# Altium PCB PCB_BoargV1_2.PcbDoc
Units mm, origin at the board's own origin, x right, y up, seen from the top; angles counter-clockwise.
Board outline 68.25 x 53.25 mm, 2 copper layers (Top Layer, Bottom Layer); 56 components, 60 nets, 239 pads, 32 vias.
Unrouted connection lines stored in the file: 43.
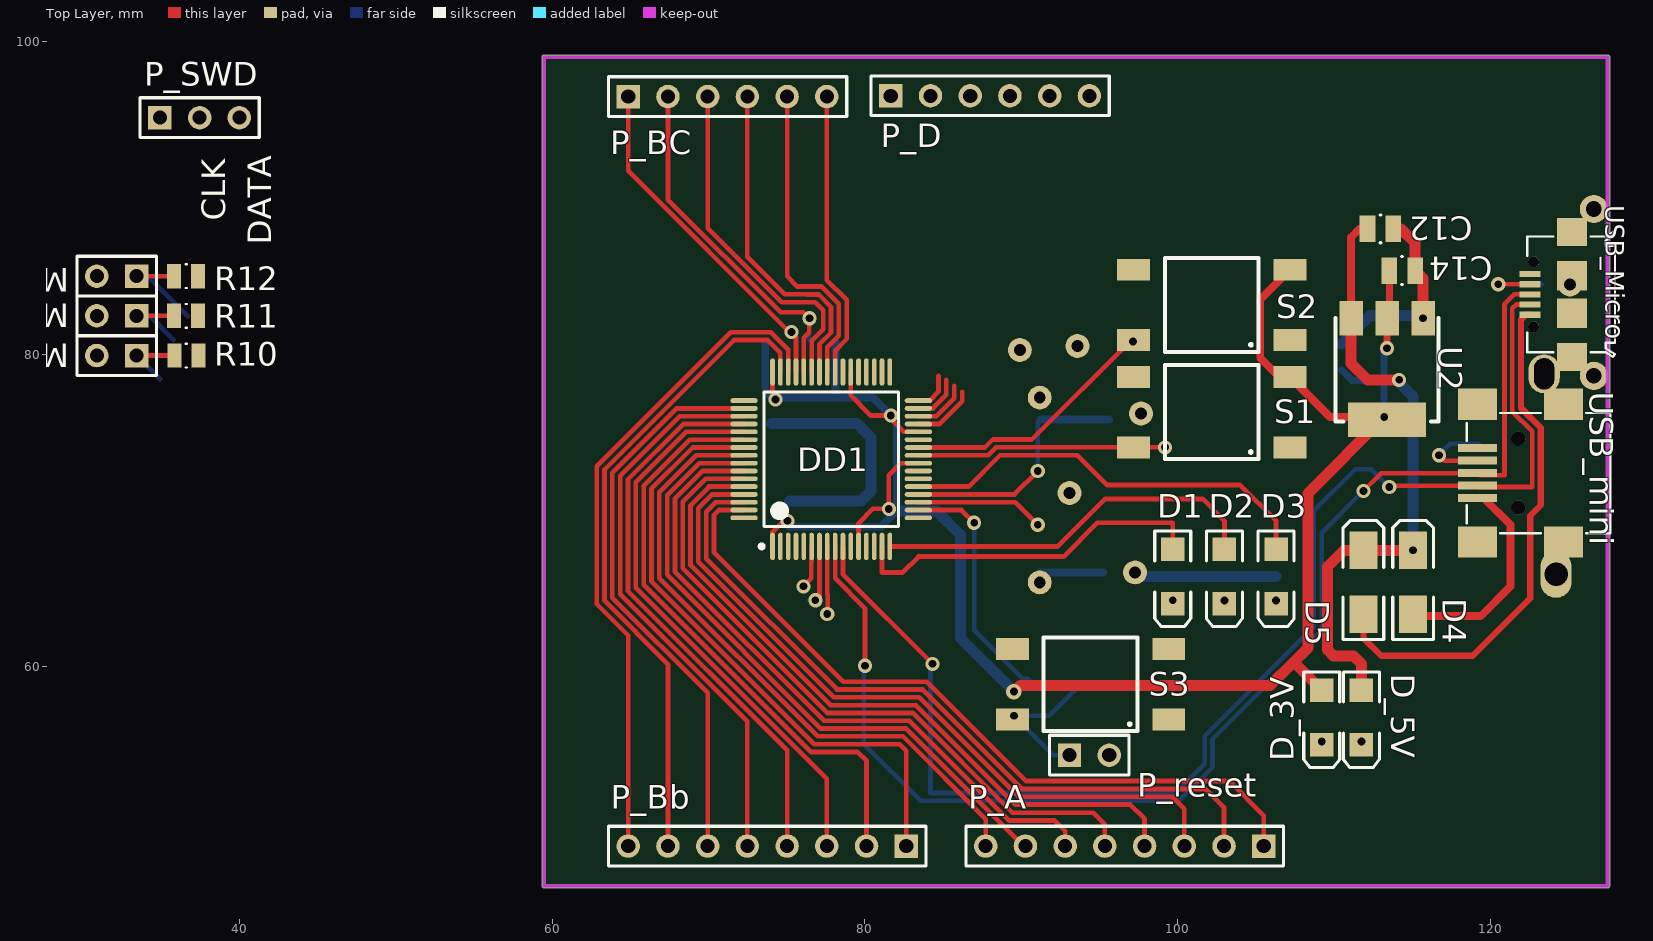
[diagram p0: Top Layer view]
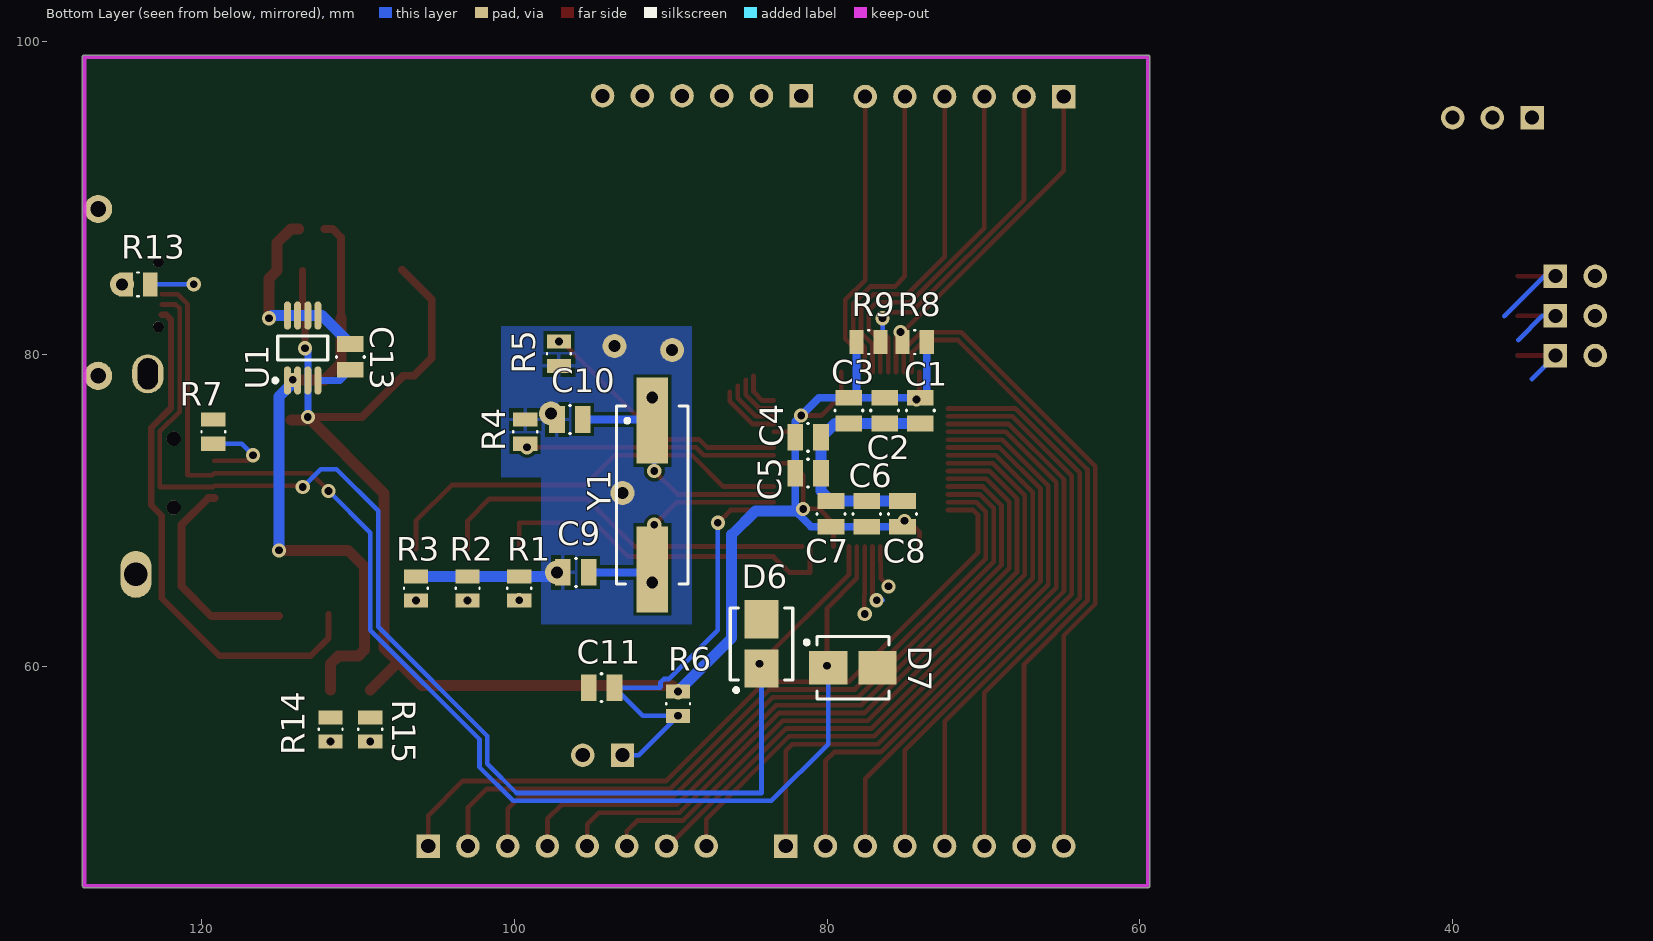
[diagram p1: Bottom Layer view, seen from below]

## Layer stack, top to bottom
Top Solder: solder mask 0.0102, Solder Resist, Dk 3.5
Top Layer: signal copper 0.0356
Dielectric 1: dielectric 0.32, FR-4, Dk 4.8
Bottom Layer: signal copper 0.0356
Bottom Solder: solder mask 0.0102, Solder Resist, Dk 3.5

## Board outline
59.373,46 ccw(c59.5,46) 59.5,45.873 127.5,45.873 ccw(c127.5,46) 127.627,46 127.627,99 ccw(c127.5,99) 127.5,99.127 59.5,99.127 ccw(c59.5,99) 59.373,99

## Design rules (kind name [scope] priority, off if disabled: settings)
Clearance [All] p1: gap=0.2
PolygonConnect [All] p1: connectstyle=Relief reliefconductorwidth=0.254 reliefentries=4 polygonreliefangle="90 Angle" airgapwidth=0.254
RoutingVias [All] p1: holewidth=0.6 width=1.27 viastyle="Through Hole" minholewidth=0.4 minwidth=0.8 maxholewidth=0.5 maxwidth=0.9
SolderMaskExpansion [All] p1: expansion=0.102
Width Width_3V3 [InNet('3.3V')] p1: maxlimit=0.9 minlimit=0.254 preferedwidth=0.5
Width Width_5V [InNet('5V')] p2: maxlimit=0.9 minlimit=0.254 preferedwidth=0.5
Width Width_GND [InNet('GND')] p3: maxlimit=0.9 minlimit=0.254 preferedwidth=0.5
Width [All] p4: maxlimit=0.6 minlimit=0.254 preferedwidth=0.3
29 further rules are at their usual default settings.

## Components (designator, comment, footprint, x,y, rotation, side; value= is the part's Value field where it differs from the comment)
C1 "CAP" C0805C 74.042,75.565 r90 bottom
C2 "CAP" C0805C 76.328,75.565 r90 bottom
C3 "CAP" C0805C 78.614,75.565 r90 bottom
C4 "CAP" C0805C 80.392,74.676 r0 bottom
C5 "CAP" C0805C 80.392,72.39 r0 bottom
C6 "CAP" C0805C 77.471,70.612 r270 bottom
C7 "CAP" C0805C 79.757,70.612 r270 bottom
C8 "CAP" C0805C 75.185,70.612 r270 bottom
C9 "CAP" C0805C 95.25,66.04 r0 bottom
C10 "CAP" C0805C 95.631,75.819 r0 bottom
C11 "CAP" C0805C 95.25,58.674 r180 bottom
C12 "CAP" C0805C 113.792,88.011 r180 top
C13 "CAP" C0805C 110.49,80.645 r270 bottom
C14 "CAP" C0805C 115.189,85.344 r180 top
D1 "LED" LED1206G 99.695,65.786 r270 top
D2 "LED" LED1206R 102.997,65.786 r270 top
D3 "LED" LED1206Y 106.299,65.786 r270 top
D4 "Diode" DSO-C2/X1.8 115.062,65.405 r90 top
D5 "Diode" DSO-C2/X1.8 111.887,65.405 r90 top
D6 "DiodeTVS" DIOM4336X22N 84.201,61.468 r90 bottom
D7 "DiodeTVS" DIOM4336X22N 78.359,59.944 r180 bottom
D_3V "LED" LED1206R 109.22,56.769 r270 top
D_5V "LED" LED1206R 111.76,56.769 r270 top
DD1 "К1986ВЕ92Q" TSQFP50P1200X1200X160-64N 77.851,73.279 r90 top
M0 "Header 2" HDR1X2J 33.433,84.987 r180 top
M1 "Header 2" HDR1X2J 33.433,82.447 r180 top
M2 "Header 2" HDR1X2J 33.433,79.907 r180 top
P_A "Header 8" HDR1X8 105.512,48.539 r180 top
P_Bb "Header 8" HDR1X8 82.652,48.539 r180 top
P_BC "Header 6" HDR1X6 64.872,96.469 r0 top
P_D "Header 6" HDR1X6 81.661,96.52 r0 top
P_reset "Header 2" HDR1X2 93.091,54.356 r0 top
P_SWD "Header 3" HDR1X3 34.925,95.123 r0 top
R1 "RES" C0805R 99.695,65.786 r270 bottom
R2 "RES" C0805R 102.997,65.786 r270 bottom
R3 "RES" C0805R 106.299,65.786 r270 bottom
R4 "RES" C0805R 99.314,75.819 r270 bottom
R5 "RES" C0805R 97.155,79.248 r90 bottom
R6 "RES" C0805R 89.535,58.42 r270 bottom
R7 "RES" C0805R 119.253,75.819 r270 bottom
R8 "RES" C0805R 75.184,80.772 r180 bottom
R9 "RES" C0805R 76.581,80.772 r0 bottom
R10 "RES" C0805R 35.846,79.907 r0 top
R11 "RES" C0805R 37.37,82.447 r180 top
R12 "RES" C0805R 37.37,84.987 r180 top
R13 "RES" C0805R 124.841,84.455 r180 bottom
R14 "RES" C0805R 111.76,56.769 r270 bottom
R15 "RES" C0805R 109.22,56.769 r270 bottom
S1 "SPST-NO" SPST-NO 107.188,74.041 r90 top
S2 "SPST-NO" SPST-NO 107.188,80.899 r90 top
S3 "SPST-NO" SPST-NO 99.441,56.642 r90 top
U1 "ADP1715ARMZ-3.3-R7" ADI-RM-8_N 113.538,80.391 r90 bottom
U2 "LM1117-3.3" SOT-223 115.697,82.296 r180 top
USB_Micro "Micro USB 2.0 Type B" 629105136821 125.222,83.82 r90 top
USB_mini "Mini USB 2.0 Type B" 65100516121 123.063,72.39 r90 top
Y1 "XTAL" "HC49SMD C" 91.186,70.993 r270 bottom

## Footprints (in the part's own frame and the unit in brackets; to place one, negate y for a bottom-side part, rotate by r counter-clockwise, add the part's x,y. Pads: shape width x height; smd on the part's side, far side on the other; paste and mask are expansions set on the pad)
65100516121 [mm] "Mini USB 2.0 Type B SMT Horizontal 5 Contacts"
  rect 0.5x2.5 smd: 1(-1.6,3.875) 2(-0.8,3.875) 3(0,3.875) 4(0.8,3.875) 5(1.6,3.875)
  round 0.9 hole 0.9 unplated: M1(-2.2,1.275) M2(2.2,1.275)
  rect 2x2.5 smd: S1(-4.4,3.875) S2(4.4,3.875) S3(-4.4,-1.625) S4(4.4,-1.625)
  silkscreen extent -3.85,-4.62 3.85,4.58, body extent -4.8,-4.62 4.8,4.63, height 3.92
629105136821 [mm] "Micro USB 2.0 SMT Type B Horizontal 5 Contacts"
  rect 0.4x1.35 smd: 1(-1.3,2.675) 2(-0.65,2.675) 3(0,2.675) 4(0.65,2.675) 5(1.3,2.675)
  round 0.7 hole 0.7 unplated: M1(-2.075,2.45) M2(2.075,2.45)
  rect 1.8x1.9 smd: S1(-4,0) S4(4,0)
  rect 1.9x1.9 smd: S2(-1.2,0) S3(1.2,0)
  silkscreen extent -4,-2.75 4,2.85, body extent -4,-2.73 4,3.17, height 2.77
ADI-RM-8_N [mm] "SOP, 8-Leads, Body 3x3mm, Pitch 0.65mm, IPC Medium Density"
  oval 1.8x0.45 smd: 1(-2.075,0.975) 2(-2.075,0.325) 3(-2.075,-0.325) 4(-2.075,-0.975) 5(2.075,-0.975) 6(2.075,-0.325) 7(2.075,0.325) 8(2.075,0.975)
  silkscreen extent -2.2,-1.6 0.77,1.88, body extent -1.6,-1.6 1.6,1.6, height 1.1
C0805C [mm]
  rect 1x1.7 smd: 1(0,0) 2(1.65,0)
  silkscreen extent 0.8,-0.89 0.85,0.89, body extent -0.21,-0.61 1.79,0.64, height 0.78
C0805R [mm]
  rect 0.9x1.55 smd: 1(0,0) 2(1.55,0)
  silkscreen extent 0.73,-0.76 0.81,0.76, body extent -0.24,-0.62 1.76,0.63, height 0.78
DIOM4336X22N [mm] "Molded Diode, 2-Leads, Body 4,31x3,62mm, IPC Medium Density"
  rect 2.45x2.15 smd: A(1.575,0) K(-1.575,0)
  silkscreen extent -3.07,-2 2.3,2, body extent -2.29,-1.97 2.28,1.97, height 2.25
DSO-C2/X1.8 [mm] "Diode; DO-214-AC/SMA; 2 C-Bend Leads; Body 5 x 2.7 mm, inc. leads (LxW)"
  rect 2.4x1.8 smd: A(-2.05,0) K(2.05,0)
  silkscreen extent -3.65,-1.3 3.95,1.3, body extent -2.74,-1.4 2.74,1.4, height 2.28
"HC49SMD C" [mm] "Quartz Crystal, SMD thickness C; Body 13.4 (inc. leads) x 4.9 mm (LxW max)"
  rect 5.5x2 smd: 1(-4.75,0) 2(4.75,0)
  silkscreen extent -5.7,-2.29 5.7,2.29, body extent -6.15,-2.25 6.15,2.25, height 3.6
HDR1X2 [mm] "Connector; Header; 2 Position"
  rect 1.5x1.5 hole 0.9: 1(0,0)
  round 1.5 hole 0.9: 2(2.54,0)
  silkscreen extent -1.27,-1.27 3.81,1.27, body extent -1.17,-1.25 3.91,1.25, height 8.2
HDR1X2J [mm] "Jumper; Connector; Header; 2 Position"
  rect 1.5x1.5 hole 0.9: 1(0,0)
  round 1.5 hole 0.9: 2(2.54,0)
  silkscreen extent -1.27,-1.27 3.81,1.27, body extent -1.24,-1.27 3.91,1.27, height 8.55
HDR1X3 [mm] "Connector; Header; 3 Position"
  rect 1.5x1.5 hole 0.9: 1(0,0)
  round 1.5 hole 0.9: 2(2.54,0) 3(5.08,0)
  silkscreen extent -1.27,-1.27 6.35,1.27, body extent -1.17,-1.25 6.45,1.25, height 8.2
HDR1X6 [mm] "Connector; Header; 6 Position"
  rect 1.5x1.5 hole 0.9: 1(0,0)
  round 1.5 hole 0.9: 2(2.54,0) 3(5.08,0) 4(7.62,0) 5(10.16,0) 6(12.7,0)
  silkscreen extent -1.27,-1.27 13.97,1.27, body extent -1.17,-1.25 14.07,1.25, height 8.2
HDR1X8 [mm] "Connector; Header; 8 Position"
  rect 1.5x1.5 hole 0.9: 1(0,0)
  round 1.5 hole 0.9: 2(2.54,0) 3(5.08,0) 4(7.62,0) 5(10.16,0) 6(12.7,0) 7(15.24,0) 8(17.78,0)
  silkscreen extent -1.27,-1.27 19.05,1.27, body extent -1.17,-1.25 19.15,1.25, height 8.2
LED1206G [mm] "SMT LED; 2 Flat Leads; 3.2X1.6X1.1"
  rect 1.5x1.5 smd: 1(-1.75,0) 2(1.75,0)
  silkscreen extent -2.9,-1.15 3.2,1.15, body extent -1.6,-0.8 1.6,0.8, height 1.11
LED1206R [mm] "SMT LED; 2 Flat Leads; 3.2X1.6X1.1"
  rect 1.5x1.5 smd: 1(-1.75,0) 2(1.75,0)
  silkscreen extent -2.9,-1.15 3.2,1.15, body extent -1.6,-0.8 1.6,0.8, height 1.11
LED1206Y [mm] "SMT LED; 2 Flat Leads; 3.2X1.6X1.1"
  rect 1.5x1.5 smd: 1(-1.75,0) 2(1.75,0)
  silkscreen extent -2.9,-1.15 3.2,1.15, body extent -1.6,-0.8 1.6,0.8, height 1.11
SOT-223 [mm] "Surface mounted, 4 pin package"
  rect 1.5x2.2 smd: 1(0,0) 2(2.3,0) 3(4.6,0)
  rect 5x2.2 smd: 4(2.3,6.5)
  silkscreen extent -1,0 5.6,6.6, body extent -0.95,-0.2 5.55,6.8, height 1.64
SPST-NO [mm] "Tactile Switch SPST-NO 6x6mm"
  rect 1.4x2.1 smd: 1(0,0) 2(4.5,0) 3(4.5,10) 4(0,10)
  silkscreen extent -0.75,2 5.25,8, body extent -0.75,0.93 5.25,9.08, height 5
TSQFP50P1200X1200X160-64N [mm] "TSQFP, 64-Leads, Body 10,00x10,00mm, Pitch 0,50mm, IPC Medium Density"
  oval 1.75x0.3 smd: 1(-5.575,3.75) 2(-5.575,3.25) 3(-5.575,2.75) 4(-5.575,2.25) 5(-5.575,1.75) 6(-5.575,1.25) 7(-5.575,0.75) 8(-5.575,0.25) 9(-5.575,-0.25) 10(-5.575,-0.75) 11(-5.575,-1.25) 12(-5.575,-1.75) 13(-5.575,-2.25) 14(-5.575,-2.75) 15(-5.575,-3.25) 16(-5.575,-3.75) 33(5.575,-3.75) 34(5.575,-3.25) 35(5.575,-2.75) 36(5.575,-2.25) 37(5.575,-1.75) 38(5.575,-1.25) 39(5.575,-0.75) 40(5.575,-0.25) 41(5.575,0.25) 42(5.575,0.75) 43(5.575,1.25) 44(5.575,1.75) 45(5.575,2.25) 46(5.575,2.75) 47(5.575,3.25) 48(5.575,3.75)
  oval 0.3x1.75 smd: 17(-3.75,-5.575) 18(-3.25,-5.575) 19(-2.75,-5.575) 20(-2.25,-5.575) 21(-1.75,-5.575) 22(-1.25,-5.575) 23(-0.75,-5.575) 24(-0.25,-5.575) 25(0.25,-5.575) 26(0.75,-5.575) 27(1.25,-5.575) 28(1.75,-5.575) 29(2.25,-5.575) 30(2.75,-5.575) 31(3.25,-5.575) 32(3.75,-5.575) 49(3.75,5.575) 50(3.25,5.575) 51(2.75,5.575) 52(2.25,5.575) 53(1.75,5.575) 54(1.25,5.575) 55(0.75,5.575) 56(0.25,5.575) 57(-0.25,5.575) 58(-0.75,5.575) 59(-1.25,5.575) 60(-1.75,5.575) 61(-2.25,5.575) 62(-2.75,5.575) 63(-3.25,5.575) 64(-3.75,5.575)
  silkscreen extent -5.7,-4.3 4.3,4.57, body extent -5,-5 5,5, height 1.6

## Part data
C1 C2 C3 C4 C5 C6 C7 C8 C9 C10 C11 C12 C13 C14: "Capacitor"
D1 D2 D3 D_3V D_5V: "Typical LED"
D4 D5: "Default Diode"
D6 D7: "Diode TVS"
M0 M1 M2 P_reset: "Header, 2-Pin"
P_A P_Bb: "Header, 8-Pin"
P_BC P_D: "Header, 6-Pin"
P_SWD: "Header, 3-Pin"
R1 R2 R3 R4 R5 R6 R7 R8 R9 R10 R11 R12 R13 R14 R15: "Resistor"
S1 S2 S3: "Tactile Switch 7.3mm, SMD"
U1: "500 mA, Low Dropout, CMOS Linear Regulator, 2.5 to 5.5 V Vin, 3.3 V Vout, Industrial, 8-pin SOP (RM-8), Reel"
U2: "500 mA Low Dropout Regulator"
USB_Micro: library part 629105136821, "Micro USB 2.0 Type B Horizontal SMT 5 Contacts WR-COM"
USB_mini: library part 65100516121, "Mini USB 2.0 Type B Horizontal SMT 5 Contacts WR-COM"
Y1: "Crystal Oscillator"

## Free pads (board coordinates)
  round 1.524 hole 0.762: 0(97.282,66.04) 0(125.095,84.455) 1(97.663,76.2) 2(93.599,80.518) 3(89.916,80.264) 4(93.091,71.12) 6(91.186,65.405) 7(91.186,77.216)
  round 1.8 hole 1: 1(126.619,78.613) 1(126.619,89.281)
  oval 2x2.5 hole 1.3 slot 2 at 90 deg: 2(123.444,78.74)
  oval 2x3 hole 1.5: 3(124.206,65.913)

## Via types
v1: diameter 0.9, hole 0.5, Top Layer to Bottom Layer, 31 vias
v2: diameter 1, hole 0.5, Top Layer to Bottom Layer, 1 vias

## Nets (pads, with @x,y where several pads share a name; then routed paths per layer and width w, separated by ;. In a path a pad name is that pad's centre, name@x,y a point inside that pad or via, vN(x,y) a via of type N, cw(c..) or ccw(c..) an arc to the next point about the centre after c; other vN are vias at no path point)
3.3V: C1.2 C2.2 C3.2 C4.2 C5.2 C6.2 C7.2 C8.2 C14.2 D_3V.1 DD1.1 DD1.12 DD1.24 DD1.28 DD1.38 DD1.48 M0.2 M1.2 M2.2 R6.1 R8.2 R9.2 S1.2 S2.2 U1.3 U2.2 U2.4 | length 130.8
  Top Layer w0.3: DD1.1 74.101,68.636 74.807,69.342 v1(75.057,69.342) ; DD1.48 74.101,77.283 v1(74.295,77.089) ; DD1.38 79.101,77.363 80.391,76.073 v1(81.662,76.073) 81.662,75.861 82.494,75.029 DD1.28 ; DD1.12 79.601,69.187 80.518,70.104 v1(81.534,70.104) 81.534,72.263 82.3,73.029 DD1.24
  Top Layer w0.45: v1(113.397,80.377) U2.2 113.539,82.438 C14.2
  Top Layer w0.5: S2.2 105.283,83.494 105.283,79.756 106.426,78.613 107.116,78.613 S1.2 109.749,75.98 v1(113.213,75.98) U2.4
  Top Layer w0.7: v2(89.535,58.42) 89.916,58.801 105.918,58.801 107.379,60.261 ; D_3V.1 107.477,60.261 107.379,60.261 ; v1(113.213,75.98) 108.331,71.098 108.331,61.214 107.379,60.261 ; U2.4 U2.4@114.277,75.796
  Bottom Layer w0.45: v1(113.213,75.98) U1.3 113.213,80.193 v1(113.397,80.377)
  Bottom Layer w0.5: R8.2 73.634,77.623 C1.2 ; v1(74.295,77.089) 74.168,77.089 C1.2 ; v1(75.057,69.342) 75.057,69.09 C8.2 C6.2 C7.2 81.028,68.962 v1@81.852,69.786 ; R9.2 78.131,77.316 C3.2@78.232,77.215 ; 82.042,70.104 C5.2 C4.2 82.042,75.693 v1(81.662,76.073) 80.52,77.215 C3.2 C3.2@78.232,77.215 ; C1.2 C2.2 C3.2@78.232,77.215
  Bottom Layer w0.7: v1@81.661,69.977 84.582,69.977 86.106,68.453 86.106,61.849 v2(89.535,58.42)
5V: C12.2 D4.K D5.K D_5V.1 U1.1 U1.2 U2.3 | length 39.7
  Top Layer w0.5: U2.3 111.097,87.474 111.634,88.011 C12.2
  Top Layer w0.7: U2.3 111.097,79.403 112.141,78.359 v1(114.173,78.359) ; D_5V.1 111.76,60.198 111.252,60.706 109.982,60.706 109.601,61.087 109.601,66.421 110.635,67.455 D5.K v1(115.062,67.455)
  Bottom Layer w0.5: U1.2@113.974,78.316 U1.2@114.031,78.316
  Bottom Layer w0.7: U1.2@113.988,78.359 114.031,78.316 115.062,77.285 v1(115.062,67.455)
GND: C1.1 C2.1 C3.1 C4.1 C5.1 C6.1 C7.1 C8.1 C9.2 C10.2 C11.1 C12.1 C13.1 C14.1 D6.A D7.A DD1.11 DD1.23 DD1.27 DD1.39 DD1.49 DD1.64 P_reset.2 P_SWD.3 pad.0 pad.1 pad.2 pad.3 pad.4 R1.1 R2.1 R3.1 R4.1 R5.1 R7.1 R10.2 R11.1 R12.1 R13.1 R14.1 R15.1 S3.2 U1.5 U1.6 U1.7 U1.8 U2.1 USB_Micro.5 USB_Micro.S1 USB_Micro.S2 USB_Micro.S3 USB_Micro.S4 USB_mini.5 USB_mini.S1 USB_mini.S2 USB_mini.S3 USB_mini.S4 | length 37.6
  Top Layer w0.7: C12.1 114.3,88.011 115.189,87.122 C14.1 115.697,84.836 v1(115.697,82.296)
  Bottom Layer w0.7: C1.1 C2.1 C3.1 79.503,75.565 C4.1 C5.1 80.392,71.247 C7.1 C6.1 C8.1 ; C9.2@97.154,65.786 R1.1 R2.1 R3.1 ; C13.1 112.311,82.466 U1.5 U1.6 U1.7 U1.8 115.527,82.466 v1(115.697,82.296)
NetC9_1: C9.1 DD1.19 pad.6 Y1.2 | length 12.3
  Top Layer w0.3: DD1.19 89.618,70.529 v1(91.059,69.088)
  Bottom Layer w0.5: Y1.2@91.186,66.04 C9.1
NetC10_1: C10.1 DD1.20 pad.7 Y1.1 | length 15.7
  Top Layer w0.3: DD1.20 89.571,71.029 v1(91.059,72.517)
  Bottom Layer w0.3: v1(91.059,72.517) Y1.1@91.059,75.616
  Bottom Layer w0.5: Y1.1@91.237,75.819 C10.1
NetC13_2: C13.2 U1.4 | length 2.4
  Bottom Layer w0.45: C13.2 111.169,78.316 U1.4
NetD1_1: D1.1 DD1.15 | length 23.3
  Top Layer w0.3: DD1.15 81.101,66.04 82.423,66.04 83.439,67.056 92.71,67.056 94.869,69.215 99.695,69.215 D1.1
NetD1_2: D1.2 R1.2 | length 0.2
  Top Layer w0.3: D1.2 v1(99.695,64.262)
NetD2_1: D2.1 DD1.16 | length 25
  Top Layer w0.3: DD1.16 92.342,67.704 95.377,70.739 101.6,70.739 102.997,69.342 D2.1
NetD2_2: D2.2 R2.2 | length 0.2
  Top Layer w0.3: D2.2 v1(102.997,64.236)
NetD3_1: D3.1 DD1.21 | length 27.2
  Top Layer w0.3: DD1.21 86.642,71.529 88.646,73.533 93.599,73.533 95.504,71.628 104.013,71.628 106.299,69.342 D3.1
NetD3_2: D3.2 R3.2 | length 0.2
  Top Layer w0.3: D3.2 v1(106.299,64.236)
NetD4_A: D4.A USB_mini.1 | length 13.8
  Top Layer w0.5: D4.A@115.062,63.246 119.38,63.246 121.285,65.151 121.285,69.088 119.583,70.79 USB_mini.1
NetD5_A: D5.A USB_Micro.1 | length 33.5
  Top Layer w0.4: D5.A@111.887,63.373 111.887,61.849 113.03,60.706 118.872,60.706 122.555,64.389 122.555,69.672 123.232,70.349 123.232,75.285 121.962,76.555 121.962,82.211 122.271,82.52 USB_Micro.1
NetD6_K: D6.K DD1.10 USB_Micro.2 USB_mini.2 | length 84
  Top Layer w0.3: DD1.10 78.601,65.925 v1(84.328,60.198) ; v1(113.538,71.501) 113.627,71.59 USB_mini.2 119.277,71.501 122.682,71.501 122.682,75.057 121.412,76.327 121.412,82.931 121.651,83.17 USB_Micro.2
  Bottom Layer w0.3: D6.K 84.201,51.935 99.869,51.935 101.735,53.801 101.735,55.579 108.712,62.556 108.712,69.977 111.379,72.644 112.395,72.644 v1(113.538,71.501)
NetD7_K: D7.K DD1.9 USB_Micro.3 USB_mini.3 | length 82
  Top Layer w0.3: DD1.9 78.101,65.663 80.01,63.754 v1(80.01,60.071) ; v1(111.887,71.247) 113.03,72.39 USB_mini.3 119.315,72.263 120.904,72.263 120.904,83.185 121.539,83.82 USB_Micro.3
  Bottom Layer w0.3: D7.K 79.934,55.067 83.566,51.435 100.076,51.435 102.235,53.594 102.235,55.372 109.22,62.357 109.22,68.58 v1(111.887,71.247)
NetD_3V_2: D_3V.2 R15.2 | length 0.2
  Top Layer w0.3: D_3V.2 v1(109.22,55.219)
NetD_5V_2: D_5V.2 R14.2 | length 0.2
  Top Layer w0.3: D_5V.2 v1(111.76,55.219)
NetDD1_2: DD1.2
NetDD1_3: DD1.3
NetDD1_4: DD1.4
NetDD1_5: DD1.5
NetDD1_6: DD1.6 M0.1 R12.2 | length 9.5
  Top Layer w0.3: M0.1 R12.2 ; v1(76.073,65.151) 76.581,65.659 76.581,66.752 76.601,66.772 DD1.6
  Bottom Layer w0.3: M0.1 34.139,84.987 36.703,82.423
NetDD1_7: DD1.7 M1.1 R11.2 | length 9.9
  Top Layer w0.3: M1.1 R11.2 ; v1(76.835,64.262) 76.708,64.389 76.962,64.389 77.101,64.528 DD1.7
  Bottom Layer w0.3: M1.1 34.266,82.447 35.814,80.899 ; v1@76.454,64.262 76.708,64.516 76.835,64.389 v1(76.835,64.262)
NetDD1_8: DD1.8 M2.1 R10.1 | length 10.3
  Top Layer w0.3: M2.1 R10.1 ; v1@77.601,63.373 77.635,63.407 77.635,64.593 77.601,64.627 DD1.8
  Bottom Layer w0.3: 34.925,78.415 M2.1 ; M2.1 32.925,79.399 M2.1
  other v1: 77.597,63.373
NetDD1_25: DD1.25 R4.2 S1.4 | length 16.2
  Top Layer w0.3: DD1.25 87.88,73.529 88.392,74.041 S1.4 v1(99.187,74.041)
  Bottom Layer w0.3: v1(99.187,74.041) R4.2@99.314,74.168
NetDD1_26: DD1.26 R5.2 S2.4 | length 16.7
  Top Layer w0.3: DD1.26 87.673,74.029 88.185,74.541 90.67,74.541 97.028,80.899 S2.4 ; v1(97.155,80.798) S2.4@97.188,80.831
NetDD1_29: DD1.29 | length 4
  Top Layer w0.3: DD1.29 84.772,75.529 86.233,76.99 86.233,77.597
NetDD1_30: DD1.30 | length 3.6
  Top Layer w0.3: DD1.30 84.565,76.029 85.725,77.189 ; 85.725,77.199 85.725,77.978
NetDD1_31: DD1.31 P_D.6 | length 3.1
  Top Layer w0.3: DD1.31 84.358,76.529 85.217,77.388 ; 85.217,77.398 85.217,78.359
NetDD1_32: DD1.32 P_D.5 | length 2.5
  Top Layer w0.3: DD1.32 84.141,77.029 84.709,77.597 84.709,78.613
NetDD1_33: DD1.33 P_D.4
NetDD1_34: DD1.34 P_D.3
NetDD1_35: DD1.35 P_D.2
NetDD1_36: DD1.36 P_D.1
NetDD1_40: DD1.40 P_BC.6 | length 18.4
  Top Layer w0.3: P_BC.6 77.572,84.734 78.843,83.463 78.843,80.968 78.101,80.226 DD1.40
NetDD1_41: DD1.41 P_BC.5 | length 20.2
  Top Layer w0.3: P_BC.5 75.032,84.98 75.692,84.32 77.241,84.32 78.343,83.218 78.343,81.175 77.601,80.433 DD1.41
NetDD1_42: DD1.42 P_BC.4 | length 21.4
  Top Layer w0.3: P_BC.4 72.492,86.221 74.892,83.82 76.327,83.82 76.335,83.812 77.042,83.812 77.843,83.011 77.843,81.382 77.101,80.64 DD1.42
NetDD1_43: DD1.43 P_BC.3 | length 22.2
  Top Layer w0.3: P_BC.3 69.952,88.054 74.693,83.312 76.835,83.312 77.343,82.804 77.343,81.589 76.601,80.847 DD1.43
NetDD1_44: DD1.44 P_BC.2 P_SWD.2 R9.1 | length 23.8
  Top Layer w0.3: P_BC.2 67.412,89.887 74.621,82.677 76.073,82.677 v1(76.454,82.296) 76.454,81.407 76.101,81.054 DD1.44
  Bottom Layer w0.3: R9.1@76.454,80.899 v1(76.454,82.296)
NetDD1_45: DD1.45 P_BC.1 P_SWD.1 R8.1 | length 22.1
  Top Layer w0.3: P_BC.1 64.872,91.719 75.184,81.407 v1(75.311,81.407) 75.601,81.117 DD1.45
NetDD1_46: DD1.46 P_Bb.8 | length 42.8
  Top Layer w0.3: P_Bb.8 64.872,62.008 62.858,64.022 62.858,72.83 71.427,81.399 73.994,81.399 75.101,80.292 DD1.46
NetDD1_47: DD1.47 P_Bb.7 | length 42
  Top Layer w0.3: P_Bb.7 67.412,60.175 63.358,64.229 63.358,72.622 71.635,80.899 73.787,80.899 74.601,80.085 DD1.47
NetDD1_50: DD1.50 P_Bb.6 | length 36.5
  Top Layer w0.3: P_Bb.6 69.952,58.342 63.858,64.436 63.858,72.415 67.972,76.529 DD1.50
NetDD1_51: DD1.51 P_Bb.5 | length 36.5
  Top Layer w0.3: DD1.51 68.179,76.029 64.358,72.208 64.358,64.643 72.492,56.509 P_Bb.5
NetDD1_52: DD1.52 P_Bb.4 | length 36.6
  Top Layer w0.3: DD1.52 68.386,75.529 64.858,72.001 64.858,64.85 75.032,54.676 P_Bb.4
NetDD1_53: DD1.53 P_Bb.3 | length 36.6
  Top Layer w0.3: DD1.53 68.593,75.029 65.358,71.794 65.358,65.057 77.572,52.843 P_Bb.3
NetDD1_54: DD1.54 P_Bb.2 | length 38.3
  Top Layer w0.3: DD1.54 68.8,74.529 65.858,71.587 65.858,65.264 76.567,54.555 79.557,54.555 80.112,54 P_Bb.2
NetDD1_55: DD1.55 P_Bb.1 | length 39.8
  Top Layer w0.3: DD1.55 69.007,74.029 66.358,71.38 66.358,65.471 76.774,55.055 82.235,55.055 82.652,54.639 P_Bb.1
NetDD1_56: DD1.56 P_A.8 | length 40.9
  Top Layer w0.3: DD1.56 69.214,73.529 66.858,71.173 66.858,65.678 76.981,55.555 82.442,55.555 87.732,50.266 P_A.8
NetDD1_57: DD1.57 P_A.7 | length 41
  Top Layer w0.3: DD1.57 69.421,73.029 67.358,70.966 67.358,65.885 77.188,56.055 82.649,56.055 90.165,48.539 P_A.7
NetDD1_58: DD1.58 P_A.6 | length 42.6
  Top Layer w0.3: DD1.58 69.628,72.529 67.858,70.759 67.858,66.093 77.396,56.555 82.857,56.555 89.239,50.173 92.143,50.173 92.812,49.505 P_A.6
NetDD1_59: DD1.59 P_A.5 | length 44
  Top Layer w0.3: DD1.59 69.836,72.029 68.358,70.551 68.358,66.3 77.603,57.055 83.064,57.055 89.446,50.673 94.615,50.673 95.352,49.936 P_A.5
NetDD1_60: DD1.60 P_A.4 | length 45.2
  Top Layer w0.3: DD1.60 70.043,71.529 68.858,70.344 68.858,66.507 77.81,57.555 83.271,57.555 89.629,51.197 96.977,51.197 97.892,50.283 P_A.4
NetDD1_61: DD1.61 P_A.3 | length 46.7
  Top Layer w0.3: DD1.61 70.25,71.029 69.358,70.137 69.358,66.714 78.017,58.055 83.478,58.055 89.836,51.697 99.662,51.697 100.432,50.927 P_A.3
NetDD1_62: DD1.62 P_A.2 | length 47.8
  Top Layer w0.3: DD1.62 70.457,70.529 69.858,69.93 69.858,66.921 78.224,58.555 83.685,58.555 90.043,52.197 101.778,52.197 102.972,51.003 P_A.2
NetDD1_63: DD1.63 P_A.1 | length 48.5
  Top Layer w0.3: DD1.63 70.664,70.029 70.358,69.723 70.358,67.31 78.613,59.055 83.947,59.055 90.297,52.705 103.302,52.705 105.512,50.495 P_A.1
NetR7_2: R7.2 USB_mini.4 | length 5.5
  Top Layer w0.3: v1(116.713,73.533) 117.056,73.19 USB_mini.4
  Bottom Layer w0.3: v1(116.713,73.533) 117.449,74.269 R7.2
NetR13_2: R13.2 USB_Micro.4 | length 4.8
  Top Layer w0.3: v1(120.508,84.47) USB_Micro.4
  Bottom Layer w0.3: v1(120.508,84.47) 123.276,84.47 R13.2
RESET: C11.2 DD1.18 P_reset.1 R6.2 S3.4 | length 28.7
  Top Layer w0.3: DD1.18 86.181,70.029 v1(86.995,69.215)
  Bottom Layer w0.3: v1@87.148,69.062 v1(86.995,69.215) 86.995,62.357 90.132,59.22 90.455,59.22 90.66,59.015 90.66,58.692 90.678,58.674 C11.2 91.796,56.87 v1(89.535,56.87) 92.049,54.356 P_reset.1
pads on no net: DD1.13 DD1.14 DD1.17 DD1.22 DD1.37 S1.1 S1.3 S2.1 S2.3 S3.1 S3.3 USB_Micro.M1 USB_Micro.M2 USB_mini.M1 USB_mini.M2

## Polygon pours and split planes (outlines as drawn)
GND on Bottom Layer "Top Layer-No Net" (solid, pour order 2): 88.646,79.121 88.646,62.738 98.298,62.738 98.298,72.136 100.838,72.136 100.838,81.788 88.646,81.788 88.646,79.121

## Keep-outs
Keep-Out Layer:
  lines w0.254: 59.5,46 59.5,99 127.5,99 127.5,46 59.5,46

## Silkscreen, mask and mechanical layers (free items; w line width, h text height)
Top Overlay:
  text "CLK" at 39.116,88.519 h1.52 r90
  text "DATA" at 42.037,86.995 h1.52 r90

## Dimensions
64.872,48.539 to 59.5,46 on Keep-Out Layer
64.872,96.469 to 59.5,99 on Keep-Out Layer
64.872,96.469 to 59.5,99 on Keep-Out Layer
82.652,48.539 to 87.732,48.539 on Keep-Out Layer
64.872,48.539 to 59.5,46 on Keep-Out Layer
64.872,48.539 to 127.5,46 on Keep-Out Layer
105.512,48.539 to 127.5,46 on Keep-Out Layer
87.732,48.539 to 127.5,46 on Keep-Out Layer
59.5,46 to 127.5,46 on Keep-Out Layer
59.5,99 to 59.5,46 on Keep-Out Layer

## Text inside footprints (layer, text, board x,y; h text height)
USB_Micro: Mechanical 1 "PCB Edge" at 127.322,82.42 h0.76 r90